# EAGLE board STM32f103 (EAGLE 9.5.1)
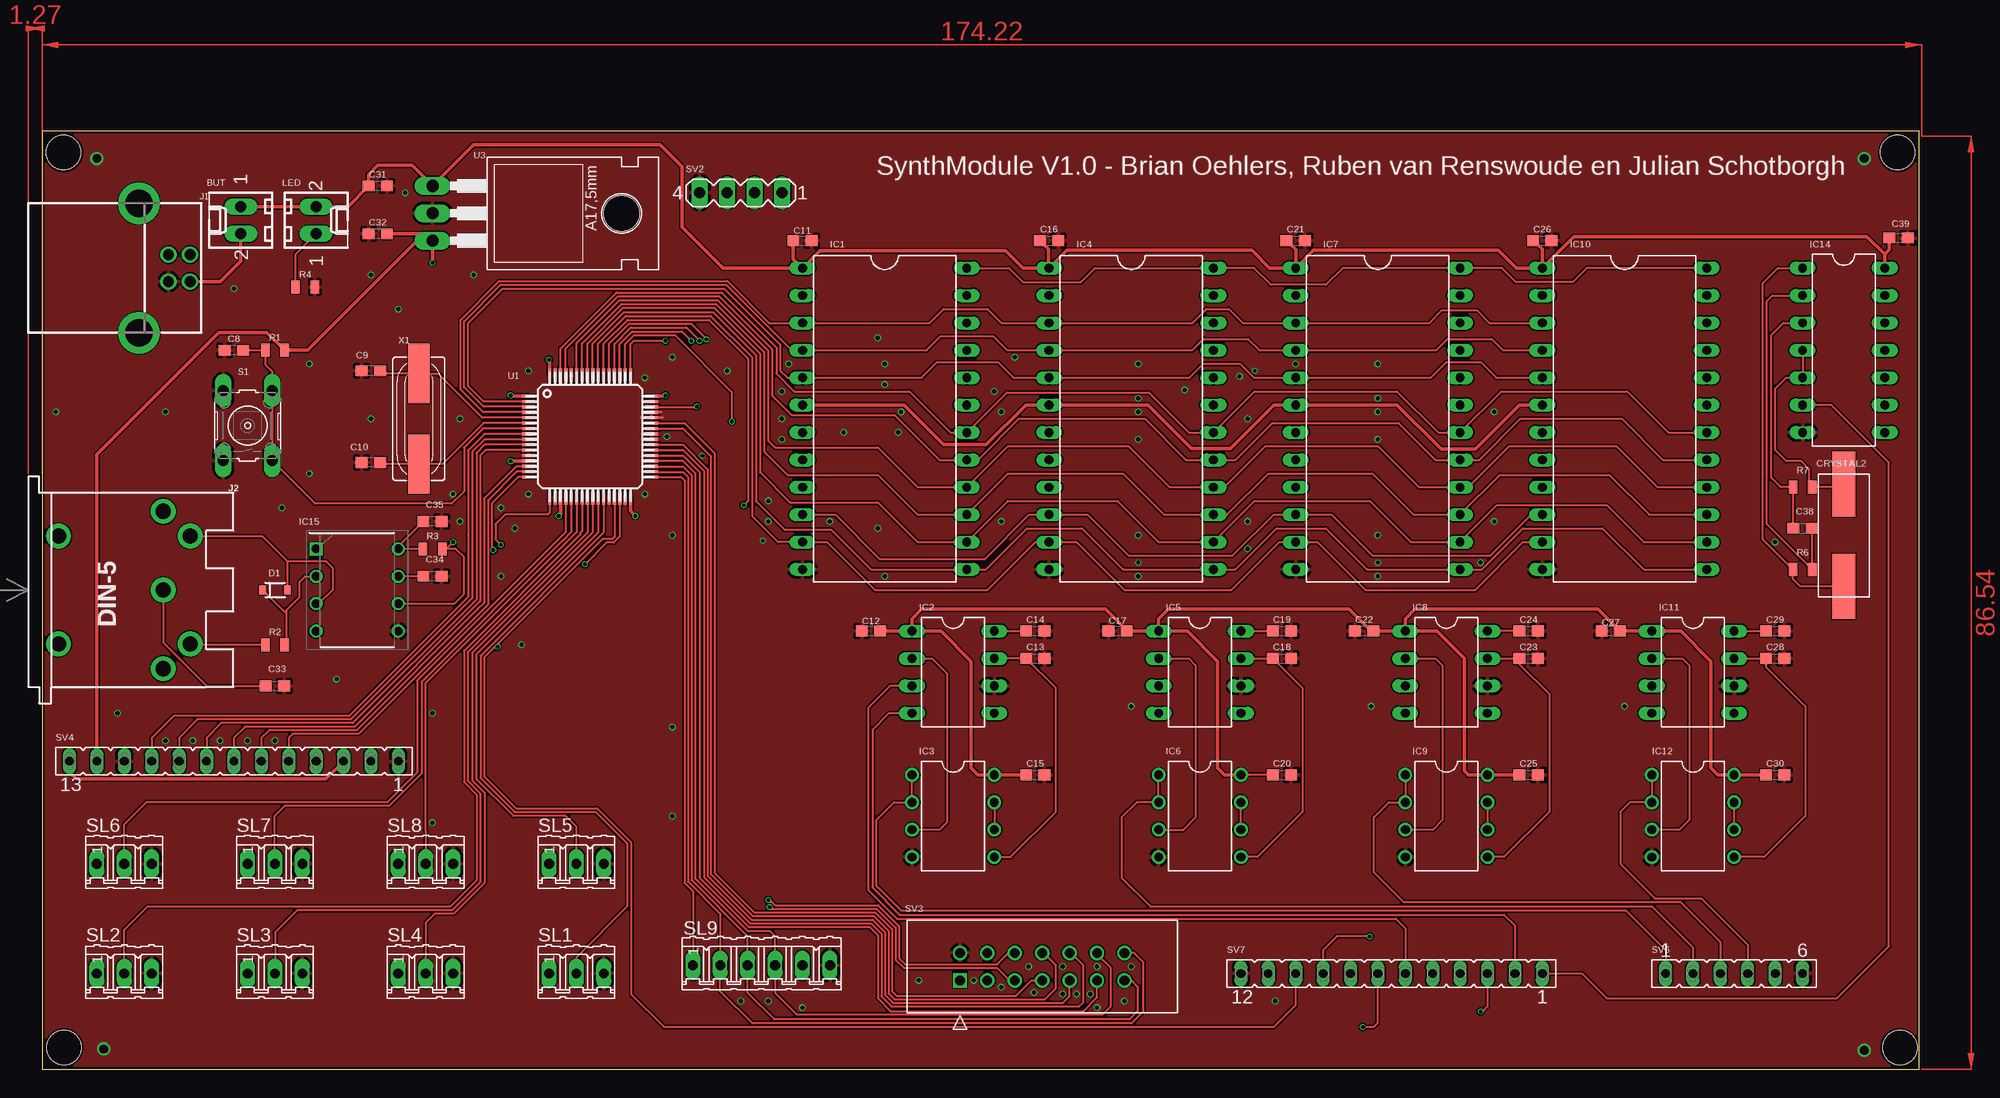
[diagram p0: board, top side]
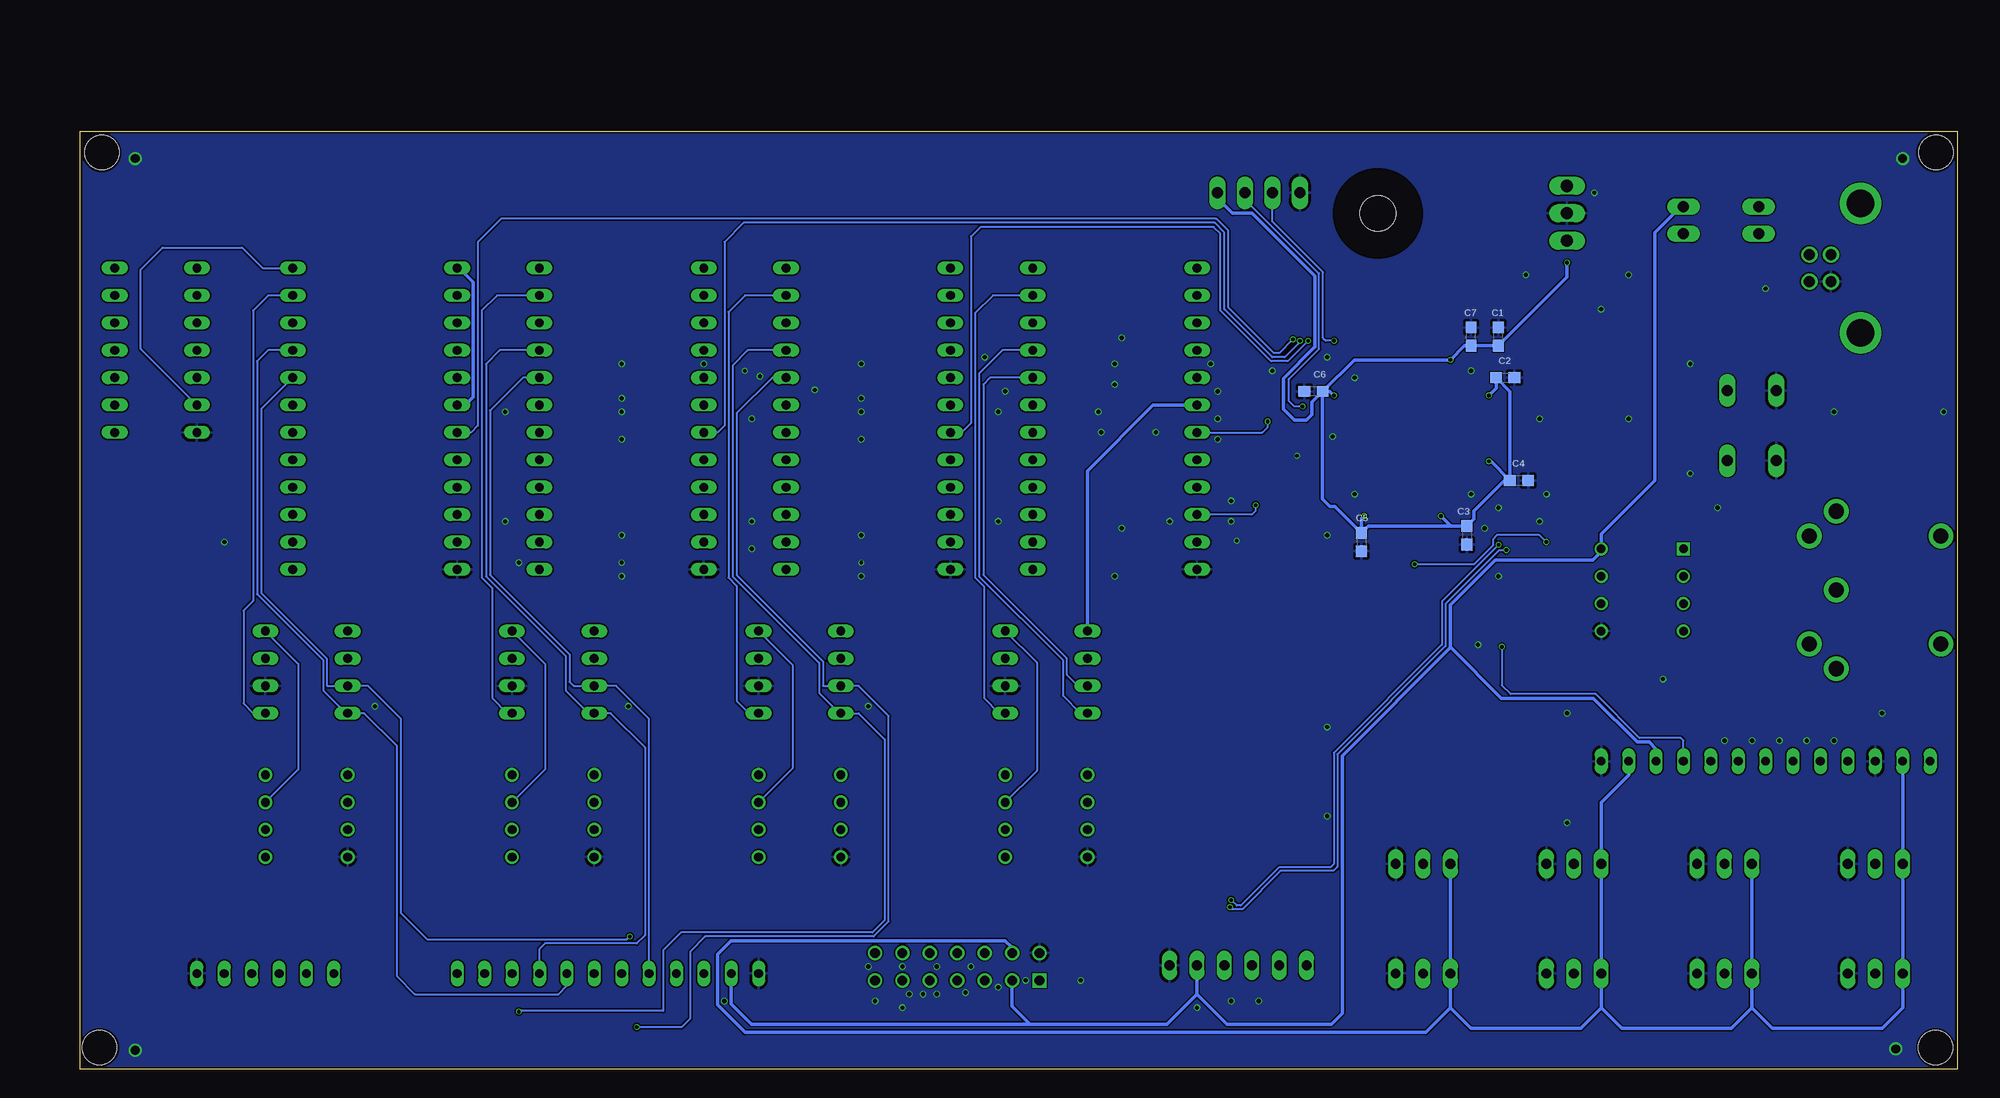
[diagram p1: board, bottom side, seen from below]

Size 174 x 87 mm. Coordinates in mm from the lower left corner, seen from the top.
Outline: 0,0 174,0 174,87 0,87 0,0
Copper layers (1*16): Top 0.035559375mm / dielectric 1.6mm / Bottom 0.035559375mm
Design rules "jlcpcb2layer": minimum track width 5mil, minimum drill 12mil, track to track 5mil, track to pad 5mil, pad to pad 5mil, via to via 5mil, smd to smd 5mil, copper to edge 8mil, drill to drill 6mil, minimum pad ring 5mil, minimum via ring 3mil, stop-mask expansion 2.5mil, vias tented up to drill 0mil, thermal gap 10mil
Holes 3.2 mm at 172,85 172.21,2.03 2,85 2.03,2.03

## Footprints (pad centres in the part's own frame; a part is rotated, then mirrored left to right if it is on the bottom)
6410-02 = drill 1.016 long: 1 1.27,0; 2 -1.27,0
C0603 = smd 1.1 x 1: 1 -0.85,0; 2 0.85,0
0603-SMD = smd 1.1 x 1: 1 -0.85,0; 2 0.85,0
ABLS-3.579545MHZ-17-B-4-Y-T-11.5X4.7X4.2 = smd 5.994 x 2.108: P$1 -4.75,0; P$2 4.75,0
SOD-323 = smd 0.63 x 0.83: A 1.15,0; C -1.15,0
YM3812 = drill 0.813 long: /CS 1.27,-7.62; /IC -8.89,-7.62; /IRQ -11.43,-7.62; /RD -1.27,-7.62; /WR -3.81,-7.62; A0 -6.35,-7.62; D0 8.89,-7.62; D1 11.43,-7.62; D2 13.97,7.62; D3 11.43,7.62; D4 8.89,7.62; D5 6.35,7.62; D6 3.81,7.62; D7 1.27,7.62; GND 13.97,-7.62; M -13.97,7.62; MO -6.35,7.62; NC@1 3.81,-7.62; NC@2 6.35,-7.62; NC@3 -1.27,7.62; NC@4 -8.89,7.62; SH -3.81,7.62; SY -11.43,7.62; VCC -13.97,-7.62
YM3014B = drill 0.813 long: BUFF -1.27,-3.81; CLK 3.81,3.81; GND 1.27,3.81; LOAD 1.27,-3.81; MP -3.81,3.81; RB -1.27,3.81; SD 3.81,-3.81; VDD -3.81,-3.81
DIL08 = drill 0.813 pad 1.27: 1 -3.81,-3.81; 2 -1.27,-3.81; 3 1.27,-3.81; 4 3.81,-3.81; 5 3.81,3.81; 6 1.27,3.81; 7 -1.27,3.81; 8 -3.81,3.81
DIL14 = drill 0.813 long: 1 -7.62,-3.81; 2 -5.08,-3.81; 3 -2.54,-3.81; 4 0,-3.81; 5 2.54,-3.81; 6 5.08,-3.81; 7 7.62,-3.81; 8 7.62,3.81; 9 5.08,3.81; 10 2.54,3.81; 11 0,3.81; 12 -2.54,3.81; 13 -5.08,3.81; 14 -7.62,3.81
DIP762W60P254L1060H465Q8N = drill 0.8 pad 1.2 square: 1 -3.81,3.81 | drill 0.8 pad 1.2: 2 -3.81,1.27; 3 -3.81,-1.27; 4 -3.81,-3.81; 5 3.81,-3.81; 6 3.81,-1.27; 7 3.81,1.27; 8 3.81,3.81
USB-B = drill 1 pad 1.508: 1 1.25,7.37; 2 -1.25,7.37; 3 -1.25,5.37; 4 1.25,5.37 | drill 2.54 pad 3.81: P$1 -6,2.63; P$2 6,2.63
DIN5-RA-PTH = drill 1.4 pad 2.286: 1 7.3,12.5; 2 0,12.5; 3 -7.3,12.5; 4 5,15; 5 -5,15; 6 -5,2.8; 7 5,2.8
0805-SMD = smd 0.8 x 1.2: 1 -0.9,0; 2 0.9,0
B3F-10XX = drill 1.016 long: 1 -3.251,2.261; 2 3.251,2.261; 3 -3.251,-2.261; 4 3.251,-2.261
03P = drill 0.914 long: 1 -2.54,0; 2 0,0; 3 2.54,0
06P = drill 0.914 long: 1 -6.35,0; 2 -3.81,0; 3 -1.27,0; 4 1.27,0; 5 3.81,0; 6 6.35,0
MA04-1 = drill 1.016 long: 1 -3.81,0; 2 -1.27,0; 3 1.27,0; 4 3.81,0
3M_2514-6002UB = drill 0.889 square: 1 0,2.54 | drill 0.889: 2 0,0; 3 -2.54,2.54; 4 -2.54,0; 5 -5.08,2.54; 6 -5.08,0; 7 -7.62,2.54; 8 -7.62,0; 9 -10.16,2.54; 10 -10.16,0; 11 -12.7,2.54; 12 -12.7,0; 13 -15.24,2.54; 14 -15.24,0
FE13 = drill 0.813 long: 1 -15.24,0; 2 -12.7,0; 3 -10.16,0; 4 -7.62,0; 5 -5.08,0; 6 -2.54,0; 7 0,0; 8 2.54,0; 9 5.08,0; 10 7.62,0; 11 10.16,0; 12 12.7,0; 13 15.24,0
FE06 = drill 0.813 long: 1 -6.35,0; 2 -3.81,0; 3 -1.27,0; 4 1.27,0; 5 3.81,0; 6 6.35,0
FE12 = drill 0.813 long: 1 -13.97,0; 2 -11.43,0; 3 -8.89,0; 4 -6.35,0; 5 -3.81,0; 6 -1.27,0; 7 1.27,0; 8 3.81,0; 9 6.35,0; 10 8.89,0; 11 11.43,0; 12 13.97,0
TQFP64 = smd 1.2 x 0.3: 1 -5.7,3.75; 2 -5.7,3.25; 3 -5.7,2.75; 4 -5.7,2.25; 5 -5.7,1.75; 6 -5.7,1.25; 7 -5.7,0.75; 8 -5.7,0.25; 9 -5.7,-0.25; 10 -5.7,-0.75; 11 -5.7,-1.25; 12 -5.7,-1.75; 13 -5.7,-2.25; 14 -5.7,-2.75; 15 -5.7,-3.25; 16 -5.7,-3.75; 33 5.7,-3.75; 34 5.7,-3.25; 35 5.7,-2.75; 36 5.7,-2.25; 37 5.7,-1.75; 38 5.7,-1.25; 39 5.7,-0.75; 40 5.7,-0.25; 41 5.7,0.25; 42 5.7,0.75; 43 5.7,1.25; 44 5.7,1.75; 45 5.7,2.25; 46 5.7,2.75; 47 5.7,3.25; 48 5.7,3.75 | smd 0.3 x 1.2: 17 -3.75,-5.7; 18 -3.25,-5.7; 19 -2.75,-5.7; 20 -2.25,-5.7; 21 -1.75,-5.7; 22 -1.25,-5.7; 23 -0.75,-5.7; 24 -0.25,-5.7; 25 0.25,-5.7; 26 0.75,-5.7; 27 1.25,-5.7; 28 1.75,-5.7; 29 2.25,-5.7; 30 2.75,-5.7; 31 3.25,-5.7; 32 3.75,-5.7; 49 3.75,5.7; 50 3.25,5.7; 51 2.75,5.7; 52 2.25,5.7; 53 1.75,5.7; 54 1.25,5.7; 55 0.75,5.7; 56 0.25,5.7; 57 -0.25,5.7; 58 -0.75,5.7; 59 -1.25,5.7; 60 -1.75,5.7; 61 -2.25,5.7; 62 -2.75,5.7; 63 -3.25,5.7; 64 -3.75,5.7
TO220BH = drill 1.118 long: 1 -2.54,-6.35; 2 0,-6.35; 3 2.54,-6.35 | hole 3.302: 0,11.176
HC49-4-HSMX = smd 5.5 x 2: 1 -4.2,0; 2 4.2,0

## Placement (x,y rotation side)
BUT  22-27-2021-02  [6410-02]  18.41,78.74 90 top
C1  10n  [C0603]  42.55,67.94 90 bottom
C2  10n  [C0603]  41.91,64.14 0 bottom
C3  10n  [C0603]  45.47,49.53 270 bottom
C4  1u  [C0603]  40.64,54.61 0 bottom
C5  10n  [C0603]  55.24,48.9 270 bottom
C6  10n  [C0603]  59.69,62.87 180 bottom
C7  4.7u  [C0603]  45.09,67.94 90 bottom
C8  100n  [0603-SMD]  17.78,66.67 180 top
C9  20p  [C0603]  30.48,64.77 180 top
C10  20p  [C0603]  30.48,56.26 180 top
C11  100n  [0603-SMD]  70.48,76.83 0 top
C12  100n  [0603-SMD]  76.83,40.64 180 top
C13  10u  [0603-SMD]  92.08,38.1 0 top
C14  10u  [0603-SMD]  92.08,40.64 0 top
C15  100n  [0603-SMD]  92.08,27.3 0 top
C16  100n  [0603-SMD]  93.34,76.83 0 top
C17  100n  [0603-SMD]  99.69,40.64 180 top
C18  10u  [0603-SMD]  114.94,38.1 0 top
C19  10u  [0603-SMD]  114.94,40.64 0 top
C20  100n  [0603-SMD]  114.94,27.3 0 top
C21  100n  [0603-SMD]  116.2,76.83 0 top
C22  100n  [0603-SMD]  122.56,40.64 180 top
C23  10u  [0603-SMD]  137.79,38.1 0 top
C24  10u  [0603-SMD]  137.79,40.64 0 top
C25  100n  [0603-SMD]  137.79,27.3 0 top
C26  100n  [0603-SMD]  139.06,76.83 0 top
C27  100n  [0603-SMD]  145.41,40.64 180 top
C28  10u  [0603-SMD]  160.66,38.1 0 top
C29  10u  [0603-SMD]  160.66,40.64 0 top
C30  100n  [0603-SMD]  160.66,27.3 0 top
C31  0.47u  [0603-SMD]  31.11,81.92 0 top
C32  22u  [0603-SMD]  31.11,77.47 180 top
C33  100n  [C0603]  21.59,35.56 0 top
C34  1p5  [C0603]  36.2,45.72 180 top
C35  100n  [C0603]  36.2,50.8 180 top
C38  4.7n  [C0603]  163.19,50.16 0 top
C39  100n  [C0603]  172.09,77.09 180 top
CRYSTAL2  ABLS-3.579545MHZ-17-B-4-Y-T  [ABLS-3.579545MHZ-17-B-4-Y-T-11.5X4.7X4.2]  167,49.53 270 top
D1  BAT20JFILM  [SOD-323]  21.59,44.45 0 top
IC1  YM3812  [YM3812]  78.11,60.33 270 top
IC2  YM3014B  [YM3014B]  84.45,36.83 270 top
IC3  OPA2134  [DIL08]  84.45,23.5 270 top
IC4  YM3812  [YM3812]  100.97,60.33 270 top
IC5  YM3014B  [YM3014B]  107.31,36.83 270 top
IC6  OPA2134  [DIL08]  107.31,23.5 270 top
IC7  YM3812  [YM3812]  123.83,60.33 270 top
IC8  YM3014B  [YM3014B]  130.18,36.83 270 top
IC9  OPA2134  [DIL08]  130.18,23.5 270 top
IC10  YM3812  [YM3812]  146.69,60.33 270 top
IC11  YM3014B  [YM3014B]  153.03,36.83 270 top
IC12  OPA2134  [DIL08]  153.03,23.5 270 top
IC14  74ALS04N  [DIL14]  167,66.67 270 top
IC15  6N136  [DIP762W60P254L1060H465Q8N]  29.21,44.45 0 top
J1  [USB-B]  6.35,74.3 270 top
J2  DIN5  [DIN5-RA-PTH]  -1.27,44.45 270 top
LED  22-27-2021-02  [6410-02]  25.4,78.74 270 top
R1  1K  [0805-SMD]  21.59,66.67 0 top
R2  91R  [0805-SMD]  21.59,39.37 0 top
R3  4k7  [0805-SMD]  36.2,48.26 0 top
R4  1K  [0805-SMD]  24.38,72.52 0 top
R6  470R  [0805-SMD]  163.19,46.35 180 top
R7  470R  [0805-SMD]  163.19,53.98 0 top
S1  [B3F-10XX]  19.05,59.69 90 top
SL1  [03P]  49.53,8.89 0 top
SL2  [03P]  7.62,8.89 0 top
SL3  [03P]  21.59,8.89 0 top
SL4  [03P]  35.56,8.89 0 top
SL5  [03P]  49.53,19.05 0 top
SL6  [03P]  7.62,19.05 0 top
SL7  [03P]  21.59,19.05 0 top
SL8  [03P]  35.56,19.05 0 top
SL9  [06P]  66.67,9.65 0 top
SV2  [MA04-1]  64.77,81.28 180 top
SV3  2514-6002UB  [3M_2514-6002UB]  85.09,10.79 180 top
SV4  [FE13]  17.78,28.57 180 top
SV6  [FE06]  156.84,8.89 0 top
SV7  [FE12]  125.09,8.89 180 top
U1  STM32F10XRXT6  [TQFP64]  50.8,58.67 0 top
U3  [TO220BH]  42.55,79.38 270 top
X1  CRYSTALS-NOGND-4-HSMX  [HC49-4-HSMX]  34.92,60.33 270 top

## Library data of the parts
BUT LED = con-molex; MF: MOLEX; OC_FARNELL: unknown; OC_NEWARK: unknown
C1-C7 C9 C10 = rcl; SPICEPREFIX: C
C8 C11-C32 R1-R4 R6 R7 = +HU-Lib
C33-C35 C38 C39 = Clean-Kong
CRYSTAL2 = ABLS-3.579545MHZ-17-B-4-Y-T
D1 = BAT20JFILM; AVAILABILITY: Unavailable; DESCRIPTION: BAT20 Series Switching 1 A 0.62 V Schottky Diode Surface Mount - SOD-323; MF: STMicroelectronics; MP: BAT20JFILM; PACKAGE: SOD-323 STMicroelectronics; PRICE: None
IC1 IC2 IC4 IC5 IC7 IC8 IC10 IC11 = YM
IC3 IC6 IC9 IC12 = linear
IC14 = 74xx-us; SPICEPREFIX: I
IC15 = 6N136; DESCRIPTION: Vishay 6N136 DC Input, Transistor Output Optocoupler, Through-hole DIP 8; FARNELL_PART_NUMBER: 1469469; FARNELL_PRICE-STOCK: http://uk.farnell.com/jsp/displayProduct.jsp?sku=1469469&action=view; HEIGHT: 4.65mm; MANUFACTURER_NAME: Vishay; MANUFACTURER_PART_NUMBER: 6N136
J1 = LDO
J2 = SparkFun-Connectors; PROD_ID: CONN-09481
S1 = switch-omron; MPN: B3F-1000; OC_FARNELL: 176432; OC_NEWARK: 36M3542
SL1-SL9 = con-amp-quick; OC_FARNELL: unknown; OC_NEWARK: unknown
SV2 = con-lstb; OC_FARNELL: unknown; OC_NEWARK: unknown
SV3 = 2514-6002UB; MPN: 2514-6002UB; OC_FARNELL: 1368928; OC_NEWARK: 46F4726; PACKAGE: Four-Wall Header, 14way; SUPPLIER: 3M
SV4 SV6 SV7 = con-lsta; OC_FARNELL: unknown; OC_NEWARK: unknown
U1 = stm32
U3 = bt_regulator
X1 = IQD-Frequency-Products

## Nets
3.3V: C1.1 C2.1 C3.1 C4.1 C5.1 C6.1 C7.1 C32.1 R1.2 SL1.1 SL2.1 SL3.1 SL4.1 SL5.1 SL6.1 SL7.1 SL8.1 SV2.1 SV3.4 SV4.2 SV4.12 U1.1 U1.13 U1.19 U1.32 U1.48 U1.64 U3.3
5V: BUT.1 C11.1 C12.1 C15.1 C16.1 C17.1 C20.1 C21.1 C22.1 C25.1 C26.1 C27.1 C30.1 C31.1 C35.2 C39.2 IC1./RD IC1.VCC IC2.VDD IC3.8 IC4./RD IC4.VCC IC5.VDD IC6.8 IC7./RD IC7.VCC IC8.VDD IC9.8 IC10./RD IC10.VCC IC11.VDD IC12.8 IC14.14 IC15.8 LED.2 R3.1 SL9.5 SV3.3 SV4.3 SV4.13 SV7.11 U3.1
5VBUTTON: BUT.2 J1.1
ADC1: SL6.2 U1.20
ADC2: SL7.2 U1.21
ADC3: SL8.2 U1.22
ADC-VOL1: SL2.2 U1.23
ADC-VOL2: SL3.2 U1.24
ADC-VOL3: SL4.2 U1.25
ADC-VOL4: SL5.2 U1.26
ADC-VOL-TOT: SL1.2 U1.27
DAC-OUT-0: IC3.1 IC3.2 SV6.1
DAC-OUT-1: IC6.1 IC6.2 SV6.2
DAC-OUT-2: IC9.1 IC9.2 SV6.3
DAC-OUT-3: IC12.1 IC12.2 SV6.4
EXP1-INT-A: SV3.8 U1.42
EXP1-INT-B: SV3.7 U1.43
EXP2-INT-A: SV3.5 U1.16
EXP2-INT-B: SV3.6 U1.17
EXP-RST: SV3.9 U1.39
EXP-SPI-CLK: SL9.2 SV3.14 U1.34
EXP-SPI-MISO: SL9.3 SV3.13 U1.35
EXP-SPI-MOSI: SL9.4 SV3.12 U1.36
EXP-SPI-NSS0: SV3.11 U1.37
EXP-SPI-NSS1: SV3.10 U1.38
GND: C1.2 C2.2 C3.2 C4.2 C5.2 C6.2 C7.2 C8.2 C9.2 C10.2 C11.2 C12.2 C13.2 C14.2 C15.2 C16.2 C17.2 C18.2 C19.2 C20.2 C21.2 C22.2 C23.2 C24.2 C25.2 C26.2 C27.2 C28.2 C29.2 C30.2 C31.2 C32.2 C33.2 C34.1 C35.1 C39.1 IC1.GND IC2.GND IC3.4 IC4.GND IC5.GND IC6.4 IC7.GND IC8.GND IC9.4 IC10.GND IC11.GND IC12.4 IC14.7 IC15.5 J1.4 R4.2 S1.1 S1.2 SL1.3 SL2.3 SL3.3 SL4.3 SL5.3 SL6.3 SL7.3 SL8.3 SL9.6 SV2.4 SV3.2 SV4.1 SV4.11 SV6.6 SV7.12 U1.12 U1.18 U1.28 U1.31 U1.40 U1.41 U1.44 U1.45 U1.47 U1.60 U1.63 U3.2
IO1: SV4.10 U1.8
IO2: SV4.9 U1.9
IO3: SV4.8 U1.10
IO4: SV4.7 U1.11
IO5: SV4.6 U1.14
IO6: SV4.5 U1.15
LCD-SPI-CS: SL9.1 U1.33
N$1: C9.1 U1.5 X1.1
N$2: C10.1 U1.6 X1.2
N$3: IC2.BUFF IC3.3
N$4: C18.1 IC5.RB IC6.5
N$5: C14.1 IC2.MP IC3.6 IC3.7
N$6: IC5.BUFF IC6.3
N$7: C23.1 IC8.RB IC9.5
N$8: C19.1 IC5.MP IC6.6 IC6.7
N$9: IC8.BUFF IC9.3
N$10: C28.1 IC11.RB IC12.5
N$11: C24.1 IC8.MP IC9.6 IC9.7
N$12: IC11.BUFF IC12.3
N$13: LED.1 R4.1
N$14: C29.1 IC11.MP IC12.6 IC12.7
N$15: C13.1 IC2.RB IC3.5
N$16: D1.A IC15.3 J2.5
N$17: D1.C IC15.2 R2.2
N$18: C33.1 J2.2
N$19: J2.4 R2.1
N$20: CRYSTAL2.P$1 IC14.4 IC14.5 R7.2
N$21: C34.2 IC15.7
N$25: C38.2 IC14.2 R6.1
N$26: C38.1 IC14.3 R7.1
N$27: CRYSTAL2.P$2 IC14.1 R6.2
OPEN: SV3.1
RST: C8.1 R1.1 S1.3 S1.4 U1.7
SW-CLK: SV2.3 U1.49
SW-DIO: SV2.2 U1.46
USART-RX-MIDI: IC15.6 R3.2 U1.30
USART-TX-M4: SV4.4 SV7.10 U1.29
YM1-CLK-O: IC1.SY IC2.CLK
YM1-CS: IC1./CS U1.50
YM1-OUTPUT: IC1.MO IC2.SD SV7.2
YM1-SYNC: IC1.SH IC2.LOAD SV7.6
YM2-CLK-O: IC4.SY IC5.CLK
YM2-CS: IC4./CS U1.51
YM2-OUTPUT: IC4.MO IC5.SD SV7.3
YM2-SYNC: IC4.SH IC5.LOAD SV7.7
YM3-CLK-O: IC7.SY IC8.CLK
YM3-CS: IC7./CS U1.52
YM3-OUTPUT: IC7.MO IC8.SD SV7.4
YM3-SYNC: IC7.SH IC8.LOAD SV7.8
YM4-CLK-O: IC10.SY IC11.CLK
YM4-CS: IC10./CS U1.53
YM4-OUTPUT: IC10.MO IC11.SD SV7.5
YM4-SYNC: IC10.SH IC11.LOAD SV7.9
YM-A0: IC1.A0 IC4.A0 IC7.A0 IC10.A0 U1.3
YM-CLK-I: IC1.M IC4.M IC7.M IC10.M IC14.6 SV7.1
YM-D0: IC1.D0 IC4.D0 IC7.D0 IC10.D0 U1.54
YM-D1: IC1.D1 IC4.D1 IC7.D1 IC10.D1 U1.55
YM-D2: IC1.D2 IC4.D2 IC7.D2 IC10.D2 U1.56
YM-D3: IC1.D3 IC4.D3 IC7.D3 IC10.D3 U1.57
YM-D4: IC1.D4 IC4.D4 IC7.D4 IC10.D4 U1.58
YM-D5: IC1.D5 IC4.D5 IC7.D5 IC10.D5 U1.59
YM-D6: IC1.D6 IC4.D6 IC7.D6 IC10.D6 U1.61
YM-D7: IC1.D7 IC4.D7 IC7.D7 IC10.D7 U1.62
YM-RST: IC1./IC IC4./IC IC7./IC IC10./IC U1.4
YM-WR: IC1./WR IC4./WR IC7./WR IC10./WR U1.2

## Tracks (layer width: path | path; a pad name or v marks a point on that pad's centre or on a via)
3.3V  (via drill 0.35)
  Top 0.305: C32.1 35.56,77.47 U3.3 | SV4.12 5.08,57.02 16.38,68.33 20.84,68.33 R1.2 24.63,66.67 34.68,76.72 36.09,76.72 U3.3 | v46.99,65.79 47.05,65.73 U1.64 | U1.48 57.73,62.42 v57.78,62.48 | U1.32 54.55,51.75 v54.99,51.31 | U1.19 48.05,51.48 v47.88,51.31 | U1.13 45.06,56.39 v43.43,56.39 | U1.1 43.49,62.42 v43.43,62.48 | v36.2,74.8 U3.3
  Bottom 0.152: 55.37,50.15 55.37,49.87
  Bottom 0.203: 59.58,66.95 59.56,66.96 | 55.37,50.15 54.97,49.74 C5.1 55.37,49.87
  Bottom 0.305: SV3.4 87.63,11.3 88.27,11.94 113.67,11.94 114.94,10.67 114.94,5.98 112.39,3.43 49.28,3.43 46.99,5.71 | C6.1 55.92,65.79 v46.99,65.79 45.68,67.09 C7.1 C1.1 36.2,73.44 v36.2,74.8 | C6.1 58.17,62.87 v57.78,62.48 | v54.99,51.31 55.24,51.05 C5.1 | v43.43,62.48 42.76,63.16 C2.1 41.49,62.87 C4.1 | C6.1 59.82,61.89 59.82,60.71 60.33,60.2 61.47,60.2 62.48,61.21 62.48,64.05 59.58,66.95 | 59.56,66.96 59.56,73.53 65.41,79.38 67.18,79.38 68.58,80.77 SV2.1 | 46.95,50.38 54.61,50.38 C5.1 | v47.88,51.31 46.95,50.38 | C5.1 57.7,52.2 58.17,52.2 58.84,52.87 C6.1 | 46.95,50.38 C3.1 44.83,51.02 44.83,51.78 42,54.61 C4.1 | C4.1 43.27,56.39 v43.43,56.39 | SV4.12 SL6.1 SL2.1 5.08,5.71 6.99,3.81 17.14,3.81 19.05,5.71 | 19.05,5.71 SL3.1 SL7.1 | 33.02,5.71 SL4.1 SL8.1 33.02,24.77 30.48,27.3 SV4.2 | 33.02,5.71 31.11,3.81 20.95,3.81 19.05,5.71 | 46.99,5.71 SL1.1 SL5.1 | 46.99,5.71 45.09,3.81 34.92,3.81 33.02,5.71
5V
  Top 0.203: C35.2 33.02,48.48 IC15.8 R3.1 | 100.55,40.68 C17.1 | 103.5,41.78 103.57,41.85 | 123.19,40.64 C22.1 | C20.1 IC6.8
  Top 0.305: BUT.1 LED.2 28.36,80.01 C31.1 30.27,82.97 31.11,83.82 34.29,83.82 U3.1 40.01,85.72 57.28,85.72 59.31,83.69 59.31,78.11 63.12,74.3 IC1.VCC | C11.1 69.64,75.14 IC1.VCC | IC1.VCC 72.09,75.9 89.32,75.9 90.93,74.3 IC4.VCC | IC4.VCC 93.3,74.34 93.3,76.03 C16.1 | IC4.VCC 95,75.95 112.14,75.95 113.79,74.3 IC7.VCC | IC7.VCC 116.2,75.98 C21.1 | IC7.VCC 117.86,75.95 135,75.95 136.65,74.3 IC10.VCC | IC10.VCC 139.06,76.07 138.3,76.83 C26.1 | IC10.VCC 141.99,77.22 169.16,77.22 170.81,75.56 | IC14.14 170.81,75.56 | C39.2 171.24,75.98 170.81,75.56 | IC10./RD 136.96,61.59 132.87,57.51 129.7,57.51 125.61,61.59 IC7./RD 114.17,61.59 110.13,57.56 106.53,57.56 102.49,61.59 IC4./RD 91.19,61.59 87.5,57.91 83.57,57.91 79.88,61.59 IC1./RD | C12.1 IC2.VDD | IC2.VDD 83.31,40.64 86.11,37.85 86.11,27.94 86.74,27.3 IC3.8 C15.1 | IC2.VDD 80.64,41.78 81.53,42.67 98.55,42.67 100.55,40.68 | IC5.VDD 106.17,40.64 108.97,37.85 108.97,27.94 109.6,27.3 IC6.8 | C17.1 IC5.VDD | IC5.VDD 103.5,41.78 | 103.57,41.85 104.39,42.67 121.16,42.67 123.19,40.64 | C22.1 IC8.VDD | IC8.VDD 129.29,40.64 131.83,38.1 131.83,27.69 132.21,27.3 IC9.8 C25.1 | IC8.VDD 126.36,41.78 127.25,42.67 144.23,42.67 C27.1 IC11.VDD 151.89,40.64 154.69,37.85 154.69,27.94 155.32,27.3 IC12.8 C30.1 | SV4.13 2.54,27.56 3.17,26.92 26.29,26.92 SV4.3
  Bottom 0.203: 42.86,47.18 42.8,47.24 | 33.02,48.13 33.02,48.01 | 46.93,39.05 46.99,39.12
  Bottom 0.305: IC10./RD 138.3,61.59 137.57,62.33 137.57,72.97 138.89,74.3 IC10.VCC | IC1./RD 74.55,61.59 80.64,55.5 IC2.VDD | 46.93,39.05 42.29,34.42 33.74,34.42 29.68,30.35 28.57,30.35 27.94,29.72 SV4.3 | 42.86,47.18 46.99,43.05 46.99,39.12 57.02,29.08 57.02,5.21 58.04,4.19 67.69,4.19 70.48,6.99 | 42.8,47.24 33.78,47.24 33.02,48.01 | 33.02,48.13 IC15.8 33.02,49.66 28.07,54.61 28.07,77.6 25.65,80.01 LED.2 | 85.98,4.19 87.63,5.84 SV3.3 | 85.98,4.19 111.76,4.19 113.67,6.1 SV7.11 | 70.48,6.99 SL9.5 | 70.48,6.99 73.28,4.19 85.98,4.19
5VBUTTON
  Top 0.305: BUT.2 18.41,74.93 16.53,73.05 J1.1
ADC1
  Top 0.203: U1.20 48.55,49.83 34.77,36.04 34.77,27.53 32,24.77 9.65,24.77 7.62,22.73 SL6.2
ADC2
  Top 0.203: U1.21 49.05,49.8 48.28,49.03 48.26,49.03 35.17,35.95 35.17,27.43 32.15,24.41 22.48,24.41 21.57,23.5 21.57,19.07 SL7.2
ADC3
  Top 0.203: U1.22 49.55,49.82 35.53,35.8 35.53,22.13 35.56,22.1 SL8.2
ADC-VOL1
  Top 0.203: U1.23 50.05,49.91 49.88,49.74 49.88,49.59 39.1,38.81 39.1,26.64 40.27,25.47 40.27,17.51 37.85,15.09 9.75,15.09 7.59,12.93 7.62,12.9 SL2.2
ADC-VOL2
  Top 0.203: U1.24 50.55,49.79 39.43,38.67 39.43,26.77 40.6,25.61 40.6,17.36 37.99,14.76 23.65,14.76 21.59,12.7 SL3.2
ADC-VOL3
  Top 0.203: U1.25 51.05,49.78 39.88,38.61 39.88,26.8 41.02,25.65 41.02,17.32 38.13,14.43 36.4,14.43 35.56,13.59 35.56,10.41 35.56,10.29 SL4.2
ADC-VOL4
  Top 0.203: U1.26 51.55,49.78 40.24,38.47 40.24,26.95 43.69,23.5 48.51,23.5 49.53,22.48 SL5.2
ADC-VOL-TOT
  Top 0.203: U1.27 52.05,49.76 40.64,38.35 40.64,27.04 43.8,23.88 51.31,23.88 54.23,20.95 54.23,15.11 49.53,10.41 SL1.2
DAC-OUT-0
  Top 0.203: SV6.1 150.5,11.05 146.81,14.73 79.63,14.73 77.34,17.02 77.34,23.11 78.99,24.77 IC3.2 IC3.1
DAC-OUT-1
  Top 0.203: IC6.1 IC6.2 101.47,24.77 100.08,23.37 100.08,17.78 102.74,15.11 149.22,15.11 153.03,11.3 SV6.2
DAC-OUT-2
  Top 0.203: IC9.1 IC9.2 124.84,24.77 123.44,23.37 123.44,18.29 126.24,15.49 151.89,15.49 155.51,11.87 155.57,11.81 SV6.3
DAC-OUT-3
  Top 0.203: IC12.1 IC12.2 147.19,24.77 146.3,23.88 146.3,19.05 149.48,15.88 153.8,15.88 158.12,11.56 SV6.4
EXP1-INT-A
  Top 0.203: SV3.8 92.84,10.79 93.98,9.65 93.98,7.52 92.96,6.5 79.01,6.5 78.46,7.05 78.46,12.86 77.09,14.22 65.88,14.22 62.03,18.07 62.03,56.83 59.42,59.44 56.51,59.44 U1.42
EXP1-INT-B
  Top 0.203: SV3.7 91.69,8.26 90.27,6.83 79.2,6.83 78.79,7.24 78.79,12.99 77.23,14.55 66.01,14.55 62.38,18.18 62.38,57.1 59.54,59.94 56.52,59.94 U1.43
EXP2-INT-A  (via drill 0.35)
  Top 0.203: U1.16 44.13,54.92 41.69,52.48 41.69,48.28 v41.82,48.15 | v67.44,15.04 67.6,14.88 77.37,14.88 79.12,13.13 79.12,10.16 79.88,9.4 88.52,9.4 89.66,8.26 SV3.5
  Bottom 0.203: v41.82,48.15 42.45,48.15 47.45,43.16 47.45,39.25 57.48,29.22 57.48,18.8 57.86,18.41 62.74,18.41 66.29,14.86 67.25,14.86 v67.44,15.04
EXP2-INT-B  (via drill 0.35)
  Top 0.203: U1.17 47.05,51.62 46.86,51.44 42.93,51.44 42.04,50.55 42.04,49.13 v42.53,48.64 | v67.31,15.7 67.47,15.54 67.64,15.54 67.96,15.21 77.5,15.21 79.45,13.27 79.45,10.3 80.02,9.73 88.52,9.73 89.59,10.79 SV3.6
  Bottom 0.203: v42.53,48.64 47.78,43.39 47.78,39.39 57.81,29.36 57.81,19.05 58.12,18.75 62.88,18.75 66.43,15.19 66.8,15.19 v67.31,15.7
EXP-RST
  Top 0.203: U1.39 59.41,57.92 61.7,55.64 61.7,17.94 65.77,13.87 76.98,13.87 78.13,12.72 78.13,6.92 78.88,6.17 94.62,6.17 95.25,6.8 SV3.9
EXP-SPI-CLK
  Top 0.203: U1.34 56.55,55.37 59.44,55.37 59.87,54.94 59.87,17.43 62.87,14.43 SL9.2 62.87,7.24 62.99,7.11 65.84,4.27 100.97,4.27 102.11,5.41 102.11,9.91 101.22,10.79 SV3.14
EXP-SPI-MISO
  Top 0.203: U1.35 56.54,55.88 59.44,55.88 60.2,55.12 60.2,17.57 65.41,12.36 SL9.3 65.41,7.11 67.88,4.64 100.78,4.64 101.6,5.46 101.6,7.62 100.97,8.26 SV3.13
EXP-SPI-MOSI
  Top 0.203: U1.36 56.54,56.39 59.44,56.39 60.53,55.3 60.53,17.7 65.41,12.83 67.44,12.83 67.94,12.32 SL9.4 67.94,7.11 69.98,5.08 98.3,5.08 99.06,5.84 99.06,9.4 97.79,10.67 SV3.12
EXP-SPI-NSS0
  Top 0.203: U1.37 56.53,56.9 59.43,56.9 60.96,55.37 60.96,17.74 65.49,13.21 76.71,13.21 77.47,12.45 77.47,6.6 78.66,5.41 96.52,5.41 97.79,6.68 SV3.11
EXP-SPI-NSS1
  Top 0.203: U1.38 59.41,57.42 61.37,55.46 61.37,17.8 65.63,13.54 76.84,13.54 77.8,12.58 77.8,6.78 78.74,5.84 96.14,5.84 96.52,6.22 96.52,9.65 95.38,10.79 SV3.10
GND  (via drill 0.35, 0.4, 0.8)
  Top 0.254: 57.53,60.45 57.5,60.42 U1.44 55.53,60.42 | 57.37,60.92 U1.45 55.66,60.92 | U1.41 55.63,58.92 | U1.40 55.63,58.42
  other vias: 5.08,84.45 168.91,84.45 168.91,1.78 5.71,1.91 36.2,33.02 36.2,22.86 21.59,30.48 19.05,30.48 16.51,30.48 13.97,30.48 11.43,30.48 57.91,58.67 61.21,56.9 63.5,64.77 68.58,60.33 68.58,58.42 67.31,52.7 67.31,50.8 66.8,49.02 69.22,65.41 78.11,65.41 78.11,63.5 74.3,59.05 79.38,59.05 78.11,45.72 73.03,50.8 77.47,50.16 88.9,50.8 88.9,60.96 88.27,62.87 90.17,66.04 101.6,65.41 101.6,62.23 101.6,60.96 101.6,58.42 101.6,49.53 101.6,46.99 101.6,45.72 112.39,64.77 116.2,65.41 111.76,60.33 111.76,50.8 111.76,48.26 123.83,65.41 123.83,62.23 123.83,60.96 123.83,58.42 123.83,49.53 123.83,46.99 123.83,45.72 134.62,50.8 134.62,60.96 160.66,48.9 100.33,6.35 97.79,5.71 146.69,33.66 123.19,33.66 100.97,33.66 44.45,39.37 6.99,33.02 27.3,36.2 42.55,45.72 43.81,50.16 38.73,60.33 38.1,53.34 38.73,50.8 22.23,52.07 24.77,55.24 30.48,60.33 24.77,65.41 1.27,60.96 11.43,60.96 17.78,72.39 33.66,81.28 30.48,73.66 33.02,70.48 40.01,73.66 58.42,66.04 55.88,64.14 45.09,64.77 45.09,53.34 42.55,52.07 55.88,53.34 58.42,49.53 58.42,31.75 58.42,23.5 97.79,9.53 100.97,9.53 94.61,9.53 91.44,9.53 94.61,6.99 95.89,6.99 97.16,6.99 88.9,7.62 86.36,8.26 81.28,8.26 91.95,7.11 64.77,6.35 67.31,6.35 105.92,62.99 111,64.26 68.58,62.87 79.63,60.96 70.48,5.71 114.3,6.35 133.35,46.99 77.47,67.82
  pour Bottom: -0.25,90.93 174.5,90.93 175.51,89.92 175.51,0.51 172.72,-2.29 1.27,-2.29 -5.08,4.06 -5.08,86.11
  pour Top: -5.46,4.19 1.4,-2.67 1.52,-2.67 172.47,-2.67 176.15,1.02 176.15,89.53 173.86,91.82 -0.25,91.82 -5.84,86.23 -5.84,4.45 -5.46,4.06
IO1
  Top 0.203: U1.8 41.02,58.92 39.47,57.38 39.47,49.56 39.49,49.54 39.49,43.81 28.45,32.77 12.19,32.77 10.16,30.73 SV4.10
IO2
  Top 0.203: U1.9 41.02,58.42 39.88,57.28 39.88,43.69 28.62,32.44 14.4,32.44 12.7,30.73 SV4.9
IO3
  Top 0.203: U1.10 45.09,57.91 41.02,57.91 40.26,57.15 40.26,43.56 40.01,43.31 40,43.31 28.8,32.11 16.61,32.11 15.24,30.73 SV4.8
IO4
  Top 0.203: U1.11 45.08,57.4 41.12,57.4 40.62,56.9 40.62,43.41 28.98,31.77 18.82,31.77 17.78,30.73 SV4.7
IO5
  Top 0.203: U1.14 45.06,55.88 43.94,55.88 40.97,52.91 40.97,43.26 40.39,42.67 40.38,42.67 29.15,31.45 21.03,31.45 20.32,30.73 SV4.6
IO6
  Top 0.203: U1.15 43.99,55.42 41.33,52.76 41.33,43.1 29.34,31.11 23.24,31.11 22.86,30.73 SV4.5
LCD-SPI-CS
  Top 0.203: U1.33 59.22,54.92 59.54,54.61 59.54,17.29 60.33,16.51 SL9.1
N$1
  Top 0.203: U1.5 40.8,60.42 36.69,64.53 X1.1 31.57,64.53 C9.1
N$2
  Top 0.203: C10.1 31.47,56.12 X1.2 37.12,56.12 40.92,59.93 U1.6
N$3
  Top 0.203: IC2.BUFF 82.47,38.1 83.87,36.7 83.87,22.91 83.19,22.23 IC3.3
N$4
  Top 0.203: IC6.5 112.65,19.68 116.84,23.88 116.84,35.34 C18.1 IC5.RB
N$5
  Top 0.203: IC3.7 IC3.6 | IC2.MP C14.1
  Bottom 0.203: IC2.MP 85.34,37.72 85.34,27.69 IC3.7
N$6
  Top 0.203: IC5.BUFF 106.3,38.1 106.93,37.47 106.93,23.37 105.79,22.23 IC6.3
N$7
  Top 0.203: IC9.5 135.51,19.68 139.7,23.88 139.7,34.8 136.94,37.55 C23.1 IC8.RB
N$8
  Top 0.203: IC6.6 IC6.7 | IC5.MP C19.1
  Bottom 0.203: IC6.7 107.95,27.94 107.95,37.47 IC5.MP
N$9
  Top 0.203: IC9.3 128.91,22.23 129.79,23.11 129.79,37.47 129.16,38.1 IC8.BUFF
N$10
  Top 0.203: IC12.5 159.64,19.68 163.45,23.5 163.45,33.66 159.81,37.3 C28.1 IC11.RB
N$11
  Top 0.203: IC9.7 IC9.6 | C24.1 IC8.MP
  Bottom 0.203: IC8.MP 130.94,37.59 130.94,27.81 IC9.7
N$12
  Top 0.203: IC11.BUFF 152.04,38.1 152.68,37.47 152.68,23.14 151.76,22.23 IC12.3
N$13
  Top 0.203: LED.1 23.48,75.55 R4.1
N$14
  Top 0.203: IC12.6 IC12.7 | IC11.MP C29.1
  Bottom 0.203: IC11.MP 153.8,37.59 153.8,27.81 IC12.7
N$15
  Top 0.203: IC2.RB C13.1 93.98,35.34 93.98,23.88 89.79,19.68 IC3.5
N$16
  Top 0.203: J2.5 20.4,49.45 22.73,47.12 | D1.A 22.74,47.11 22.73,47.12 | 22.73,47.12 26.29,47.12 26.92,46.48 26.92,44.45 25.65,43.18 IC15.3
N$17
  Top 0.203: D1.C 22.61,42.28 | R2.2 22.61,39.49 22.61,42.28 | 22.61,42.28 22.61,42.54 23.88,43.81 23.88,45.21 24.38,45.72 IC15.2
N$18
  Top 0.203: J2.2 11.23,39.57 15.24,35.56 C33.1
N$19
  Top 0.203: J2.4 13.81,39.37 R2.1
N$20
  Top 0.203: IC14.4 IC14.5 161.67,64.14 160.66,63.12 160.66,57.44 161.7,56.39 163.07,56.39 163.83,55.63 163.83,54.24 R7.2 166.7,53.98 CRYSTAL2.P$1
N$21
  Top 0.203: C34.2 IC15.7
N$25
  Top 0.203: C38.2 164.09,50.12 R6.1 159.89,50.56 159.89,71.25 160.4,71.75 IC14.2
N$26
  Top 0.152: 162.34,53.92 R7.1
  Top 0.203: IC14.3 161.42,69.22 160.27,68.07 160.27,54.86 161.16,53.98 R7.1 | C38.1 162.34,53.92
N$27
  Top 0.203: IC14.1 160.91,74.3 159.51,72.9 159.51,49.14 R6.2 162.29,45.48 162.99,44.78 CRYSTAL2.P$2
RST
  Top 0.203: U1.7 40.88,59.42 39.12,57.66 39.12,53.59 37.97,52.45 25.3,52.45 S1.3 S1.4 21.31,64.72 20.69,65.34 R1.1 C8.1
SW-CLK  (via drill 0.35)
  Top 0.203: U1.49 54.55,67.25 54.86,67.56 v57.78,67.56
  Bottom 0.203: v57.78,67.56 58.55,67.56 58.8,67.82 58.8,73.91 63.5,78.61 SV2.3
SW-DIO  (via drill 0.35)
  Top 0.203: v60.71,61.47 60.66,61.42 U1.46
  Bottom 0.203: v60.71,61.47 61.47,61.47 61.98,61.98 61.98,64.01 59.18,66.8 59.18,73.79 66.04,80.64 SV2.2
USART-RX-MIDI  (via drill 0.35)
  Top 0.203: IC15.6 38.23,43.18 39.12,44.07 39.12,47.5 38.35,48.26 R3.2 37.47,48.26 v38.1,48.9 | U1.30 53.55,49.4 52.99,48.84 52.33,48.84 v50.32,46.83
  Bottom 0.203: v38.1,48.9 38.73,49.53 42.67,49.53 43.05,49.15 43.05,48.58 44.8,46.83 v50.32,46.83
USART-TX-M4  (via drill 0.35)
  Top 0.203: SV7.10 116.2,5.97 114.17,3.94 57.66,3.94 54.61,6.99 54.61,21.04 51.45,24.21 43.94,24.21 40.97,27.18 40.97,38.18 41.97,39.18 v42.23,39.18 42.23,39.44 51.96,49.17 52.85,49.17 53.05,49.37 U1.29
  Bottom 0.203: SV4.4 25.4,30.48 25.65,30.73 29.46,30.73 33.53,34.8 41.41,34.8 42.23,35.62 v42.23,39.18
YM1-CLK-O
  Bottom 0.203: IC1.SY 89.41,71.75 91.06,70.1 91.06,45.59 90.22,44.76 90.22,34.42 88.82,33.02 IC2.CLK
YM1-CS  (via drill 0.35)
  Top 0.203: U1.50 54.05,67.26 54.86,68.07 58.67,68.07 63.93,62.82 v63.93,60.07
  Bottom 0.203: IC1./CS 64.44,59.05 63.93,59.56 v63.93,60.07
YM1-OUTPUT
  Top 0.203: IC2.SD 78.49,33.02 76.96,31.5 76.96,16.89 79.5,14.35 135.51,14.35 136.53,13.34 SV7.2
  Bottom 0.203: IC1.MO 88.52,66.67 90.68,64.52 90.68,45.72 82.93,37.97 82.93,34.67 81.28,33.02 IC2.SD
YM1-SYNC
  Top 0.203: IC2.LOAD 78.61,35.56 76.58,33.53 76.58,16.64 79.25,13.97 125.48,13.97 126.36,13.08 SV7.6
  Bottom 0.203: IC1.SH 89.66,64.14 90.3,63.5 90.3,45.85 82.55,38.1 82.55,36.58 81.53,35.56 IC2.LOAD
YM2-CLK-O
  Bottom 0.203: IC4.SY 112.39,71.75 113.92,70.23 113.92,45.59 113.16,44.83 113.16,34.16 112.01,33.02 IC5.CLK
YM2-CS  (via drill 0.35)
  Top 0.203: U1.51 53.55,67.27 54.71,68.43 59.3,68.43 v60.18,67.55
  Bottom 0.203: v60.18,67.55 62.07,65.66 63.63,65.66 68.33,70.36 68.33,77.47 68.96,78.11 90.55,78.11 91.44,77.22 91.44,59.94 92.33,59.05 IC4./CS
YM2-OUTPUT  (via drill 0.35)
  Top 0.203: v133.35,5.35 133.49,5.35 133.99,5.84 SV7.3
  Bottom 0.203: IC4.MO 112.14,66.67 113.54,65.28 113.54,45.72 105.51,37.69 105.51,34.91 103.63,33.02 IC5.SD 101.85,33.02 99.44,30.61 99.44,13.84 100.58,12.7 118.32,12.7 119.96,11.06 119.96,5.43 133.27,5.43 v133.35,5.35
YM2-SYNC  (via drill 0.35)
  Top 0.203: v122.43,3.94 123.44,3.94 123.83,4.32 SV7.7
  Bottom 0.203: IC4.SH 109.86,64.14 113.16,60.83 113.16,45.85 105.16,37.85 105.16,35.56 IC5.LOAD 101.85,35.56 99.06,32.77 99.06,13.72 100.46,12.32 116.08,12.32 117.47,10.92 117.47,4.7 118.24,3.94 v122.43,3.94
YM3-CLK-O
  Bottom 0.203: IC7.SY 135.38,71.75 136.78,70.36 136.78,45.59 135.81,44.63 135.81,34.42 134.41,33.02 IC8.CLK
YM3-CS  (via drill 0.35)
  Top 0.203: U1.52 53.05,67.27 54.56,68.78 59.73,68.78 v60.95,67.56
  Bottom 0.203: v60.95,67.56 60.95,67.43 62.34,66.04 63.5,66.04 67.94,70.48 67.94,77.6 68.83,78.49 112.52,78.49 114.3,76.71 114.3,59.69 114.94,59.05 IC7./CS
YM3-OUTPUT
  Bottom 0.203: IC7.MO 135.13,66.67 136.4,65.41 136.4,45.72 129.01,38.33 129.01,35.16 126.87,33.02 IC8.SD 124.84,33.02 121.67,29.84 121.67,12.45 122.43,11.68 130.94,11.68 131.44,11.18 SV7.4
YM3-SYNC
  Bottom 0.203: IC7.SH 132.97,64.14 136.02,61.09 136.02,45.85 128.65,38.48 128.65,35.94 128.27,35.56 IC8.LOAD 124.33,35.56 121.28,32.51 SV7.8
YM4-CLK-O
  Bottom 0.203: IC10.SY 156.59,71.75 157.99,70.36 157.99,43.43 158.88,42.55 158.88,33.91 157.99,33.02 IC11.CLK
YM4-CS  (via drill 0.35)
  Top 0.203: U1.53 52.55,67.28 54.41,69.14 60.15,69.14 v61.59,67.69
  Bottom 0.203: v61.59,67.69 62.87,66.42 63.37,66.42 67.59,70.64 67.59,77.75 68.71,78.87 135,78.87 137.16,76.71 137.16,59.69 137.79,59.05 IC10./CS
YM4-OUTPUT
  Bottom 0.203: IC10.MO 156.59,66.67 157.61,65.66 157.61,44.07 151.49,37.95 151.49,35.15 149.35,33.02 IC11.SD 147.7,33.02 144.65,29.97 144.65,8.64 143,6.99 129.67,6.99 128.91,7.75 SV7.5
YM4-SYNC  (via drill 0.35)
  Top 0.203: v123.06,12.32 120.02,12.32 118.75,11.05 SV7.9
  Bottom 0.203: IC10.SH 157.23,61.21 157.23,44.16 151.16,38.08 151.16,35.59 151.13,35.56 IC11.LOAD 147.32,35.56 144.27,32.51 144.27,14.48 141.86,12.06 123.32,12.06 v123.06,12.32
YM-A0
  Top 0.203: U1.3 45.09,61.43 40.94,61.43 39.12,63.26 39.12,69.35 42.52,72.76 63.39,72.76 69.47,66.67 IC1.A0 81.99,66.67 83.29,67.97 88.16,67.97 89.46,66.67 IC4.A0 106.63,66.67 107.67,67.72 111.78,67.72 112.83,66.67 IC7.A0 129.24,66.67 130.28,67.72 134.39,67.72 135.43,66.67 IC10.A0
YM-CLK-I
  Top 0.203: IC10.M 143.18,74.3 141.88,73 136.63,73 135.33,74.3 IC7.M 120.57,74.3 119.02,72.75 113.9,72.75 112.35,74.3 IC4.M 97.58,74.3 96.29,73 90.91,73 89.61,74.3 IC1.M | IC14.6 165.86,61.59 171.2,56.26 171.2,11.43 166.37,6.6 145.03,6.6 142.75,8.89 SV7.1
  Bottom 0.203: IC14.6 168.4,66.8 168.4,74.17 166.37,76.2 159,76.2 157.1,74.3 IC10.M
YM-D0  (via drill 0.35)
  Top 0.203: U1.54 52.05,67.28 54.26,69.49 61.83,69.49 65.43,65.89 65.43,52.68 v65.05,52.3 | IC10.D0 138.05,51.44 134.24,47.62 123.32,47.62 119.51,51.44 IC7.D0 114.17,51.44 110.36,47.62 100.71,47.62 96.9,51.44 IC4.D0 91.49,51.44 87.4,47.35 77.63,47.35 73.54,51.44 IC1.D0
  Bottom 0.203: v65.05,52.3 65.05,51.79 65.41,51.44 IC1.D0
YM-D1
  Top 0.203: U1.55 51.55,67.3 54.1,69.85 61.98,69.85 65.84,65.99 65.84,51.27 68.21,48.9 IC1.D1 72.77,48.9 77.22,44.45 87.63,44.45 92.08,48.9 IC4.D1 95.89,48.9 100.33,44.45 110.24,44.45 114.68,48.9 IC7.D1 118.24,48.9 122.68,44.45 132.84,44.45 137.29,48.9 IC10.D1
YM-D2
  Top 0.203: U1.56 51.05,67.3 53.95,70.21 62.21,70.21 66.17,66.25 66.17,52.69 68.82,50.04 73.15,50.04 76.83,46.35 IC1.D2 87.5,46.35 91.31,50.16 96.39,50.16 100.2,46.35 IC4.D2 110.62,46.35 114.43,50.16 119,50.16 122.81,46.35 IC7.D2 133.48,46.35 137.29,50.16 144.65,50.16 148.46,46.35 IC10.D2
YM-D3
  Top 0.203: U1.57 50.55,67.3 53.86,70.61 62.31,70.61 66.55,66.37 66.55,55.37 69.34,52.58 77.47,52.58 81.15,48.9 IC1.D3 89.53,52.7 99.69,52.7 103.5,48.9 IC4.D3 112.39,52.7 123.06,52.7 126.87,48.9 IC7.D3 134.87,52.32 145.03,52.32 148.46,48.9 IC10.D3
YM-D4
  Top 0.203: IC10.D4 148.97,51.44 145.29,55.12 135.13,55.12 IC7.D4 127.13,51.44 123.32,55.24 113.67,55.24 109.86,51.44 IC4.D4 104.01,51.44 100.2,55.24 89.53,55.24 IC1.D4 81.15,51.44 77.47,55.12 69.09,55.12 66.93,57.28 66.93,66.51 62.47,70.97 53.71,70.97 50.05,67.31 U1.58
YM-D5
  Top 0.203: U1.59 49.55,67.33 53.54,71.32 62.62,71.32 67.31,66.63 67.31,58.29 67.94,57.66 77.47,57.66 81.15,53.98 IC1.D5 89.53,57.78 100.71,57.78 104.52,53.98 IC4.D5 109.6,53.98 113.41,57.78 123.83,57.78 127.64,53.98 IC7.D5 132.21,53.98 136.02,57.78 145.92,57.78 149.73,53.98 IC10.D5
YM-D6
  Top 0.203: IC10.D6 150.24,56.52 146.43,60.33 137.03,60.33 133.22,56.52 IC7.D6 129.16,56.52 125.73,59.94 114.05,59.94 110.62,56.52 IC4.D6 106.05,56.52 102.23,60.33 90.55,60.33 86.74,56.52 IC1.D6 83.18,56.52 79.01,60.68 69.47,60.68 67.67,62.48 67.67,66.78 62.77,71.68 53.39,71.68 48.55,66.84 U1.61
YM-D7
  Top 0.203: IC10.D7 150.75,59.05 146.94,62.87 135.25,62.87 IC7.D7 129.41,59.05 125.6,62.87 112.39,62.87 IC4.D7 106.3,59.05 102.59,62.76 89.43,62.76 IC1.D7 84.2,59.05 80.39,62.87 69.72,62.87 68.07,64.52 68.07,66.93 62.97,72.03 53.24,72.03 48.05,66.85 U1.62
YM-RST
  Top 0.203: U1.4 40.9,60.92 38.79,63.04 38.79,69.49 42.38,73.09 63.52,73.09 67.4,69.22 IC1./IC 82.25,69.22 83.54,70.51 87.65,70.51 88.95,69.22 IC4./IC 106.63,69.22 107.93,70.51 110,70.51 111.3,69.22 IC7./IC 128.6,69.22 129.77,70.38 132.99,70.38 134.16,69.22 IC10./IC
YM-WR
  Top 0.203: U1.2 40.95,61.92 39.5,63.37 39.5,69.22 42.67,72.39 63.24,72.39 68.43,67.2 68.43,64.8 69.09,64.14 IC1./WR 81.53,64.14 82.96,65.56 88.62,65.56 90.04,64.14 IC4./WR 106.38,64.14 107.67,65.43 111.02,65.43 112.32,64.14 IC7./WR 128.73,64.14 130.15,65.56 133.37,65.56 134.8,64.14 IC10./WR
(copper drawn outside any net)
  shapes: Top area x3

## Text on the board
tNames: SynthModule V1.0 - Brian Oehlers, Ruben van Renswoude en Julian Schotborgh